# Altium PCB PCB.PcbDoc (part 1 of 2)
Units mil, origin at the board's own origin, x right, y up, seen from the top; angles counter-clockwise.
Board outline 4230 x 2520 mil, 4 copper layers (Top Layer, Int1 (GND), Int2 (PWR), Bottom Layer), stack 62.45 mil thick; 113 components, 91 nets, 361 pads, 344 vias.
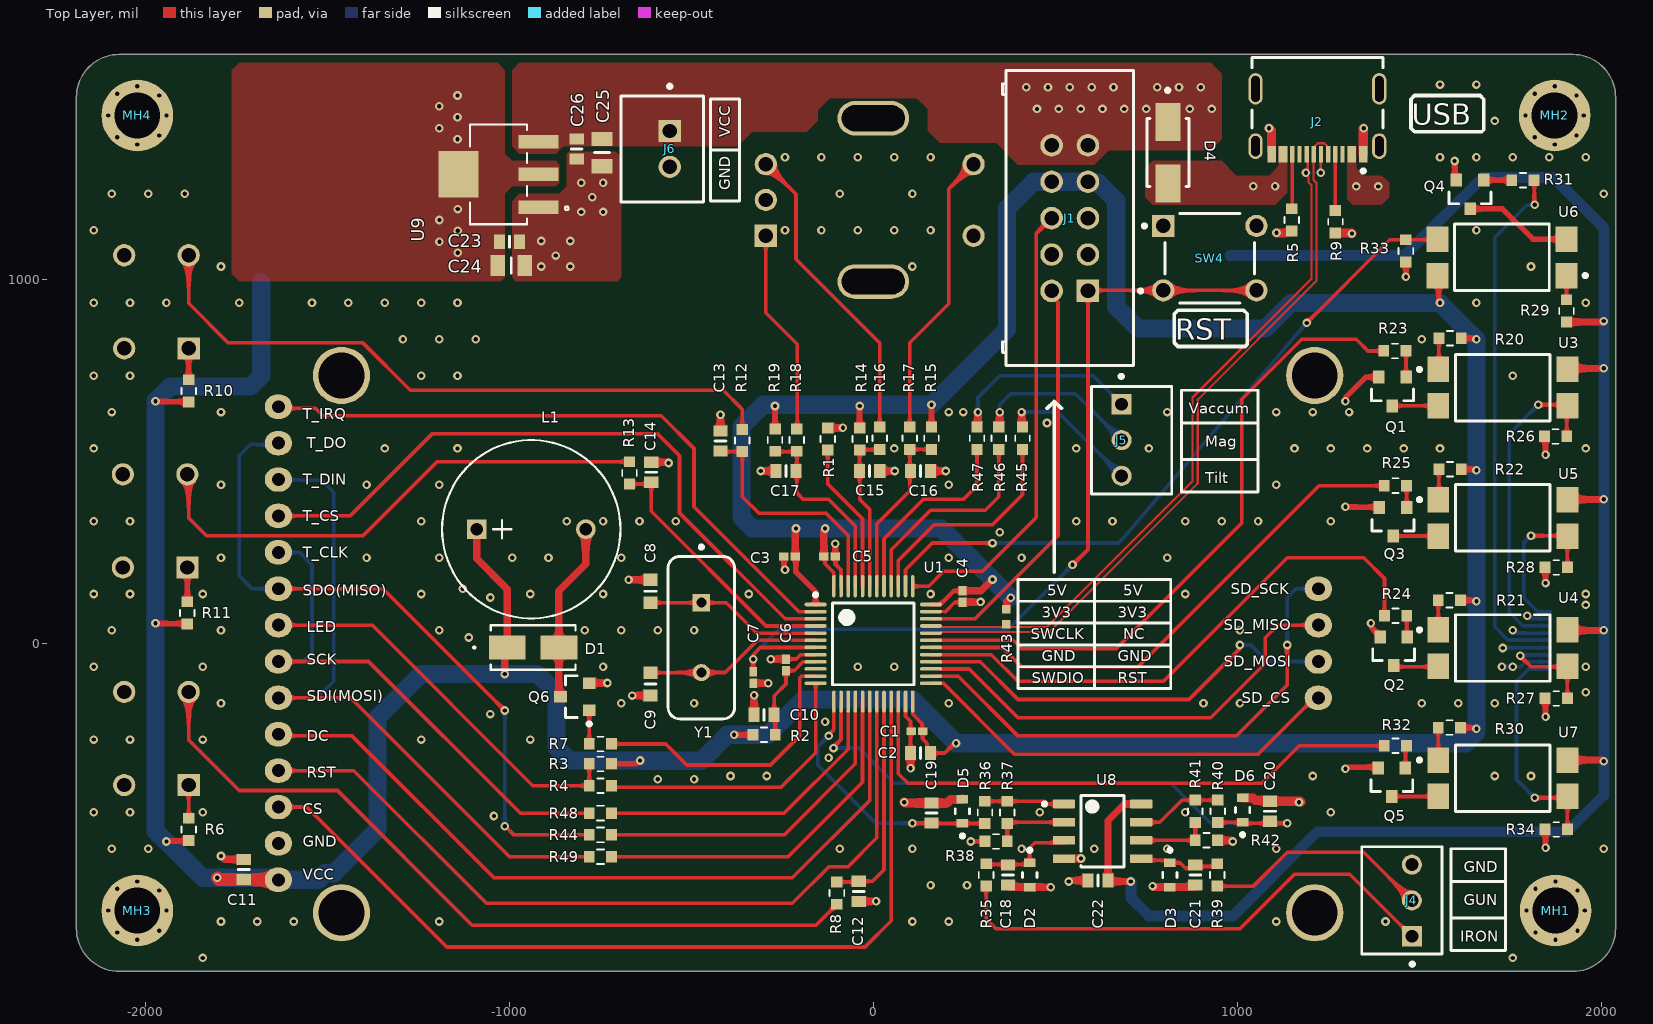
[diagram p0: Top Layer view]
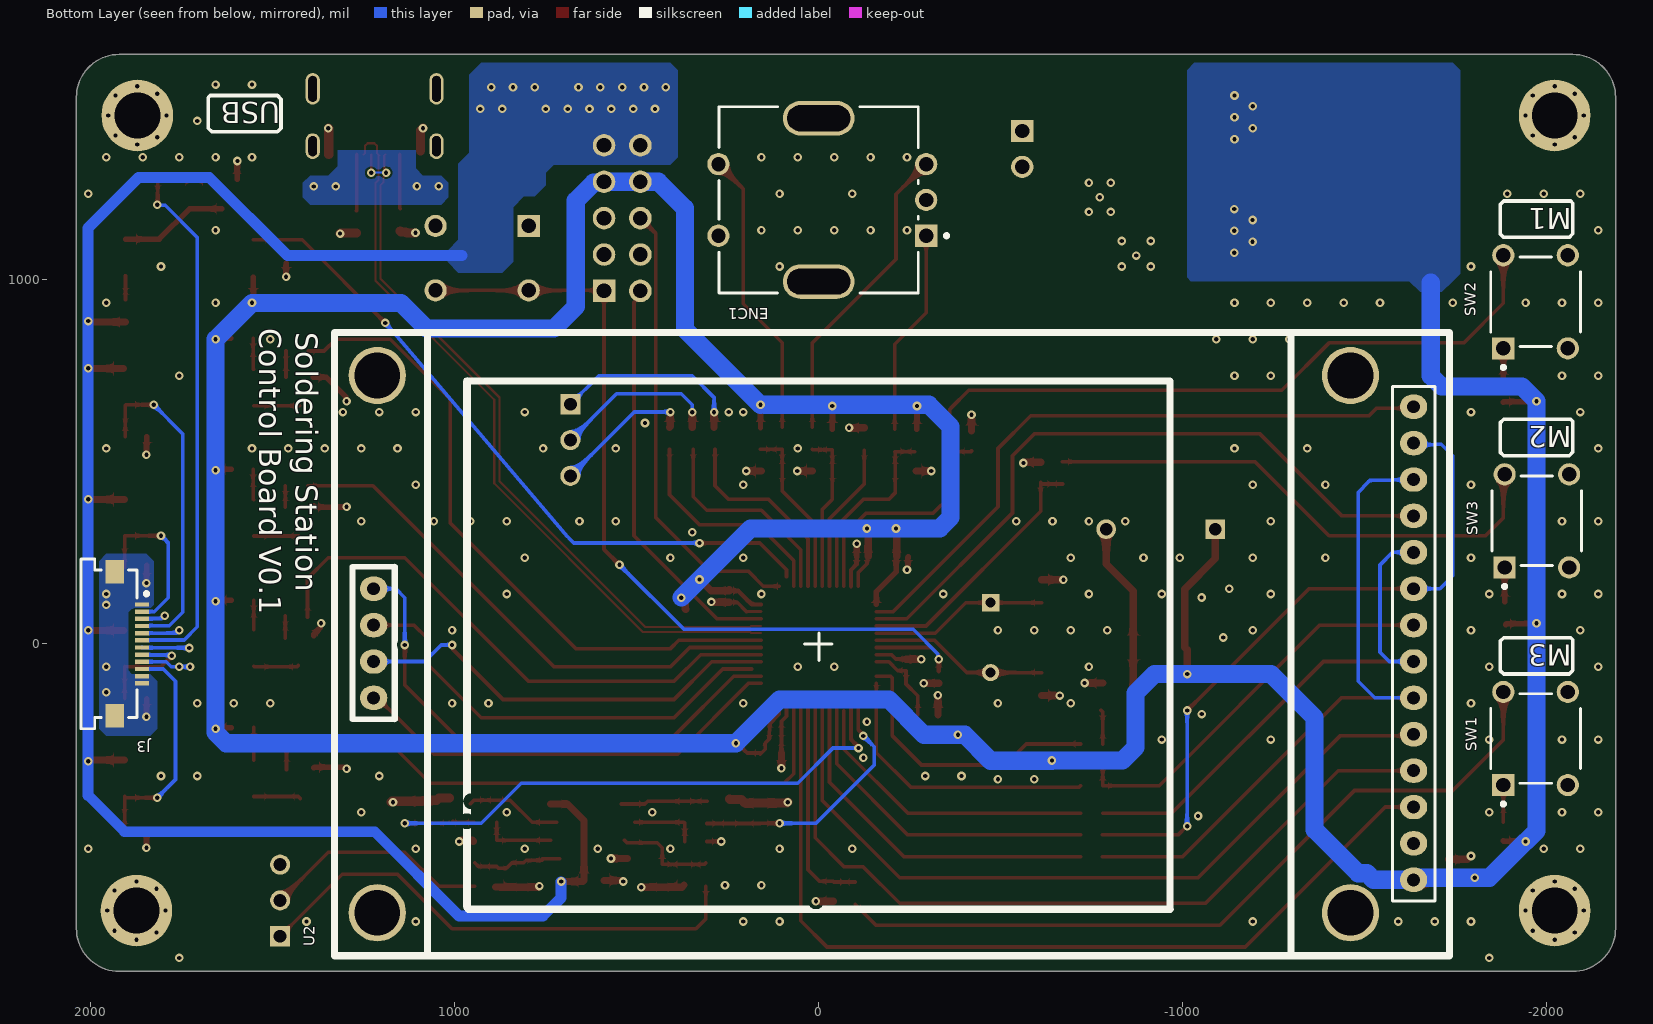
[diagram p1: Bottom Layer view, seen from below]
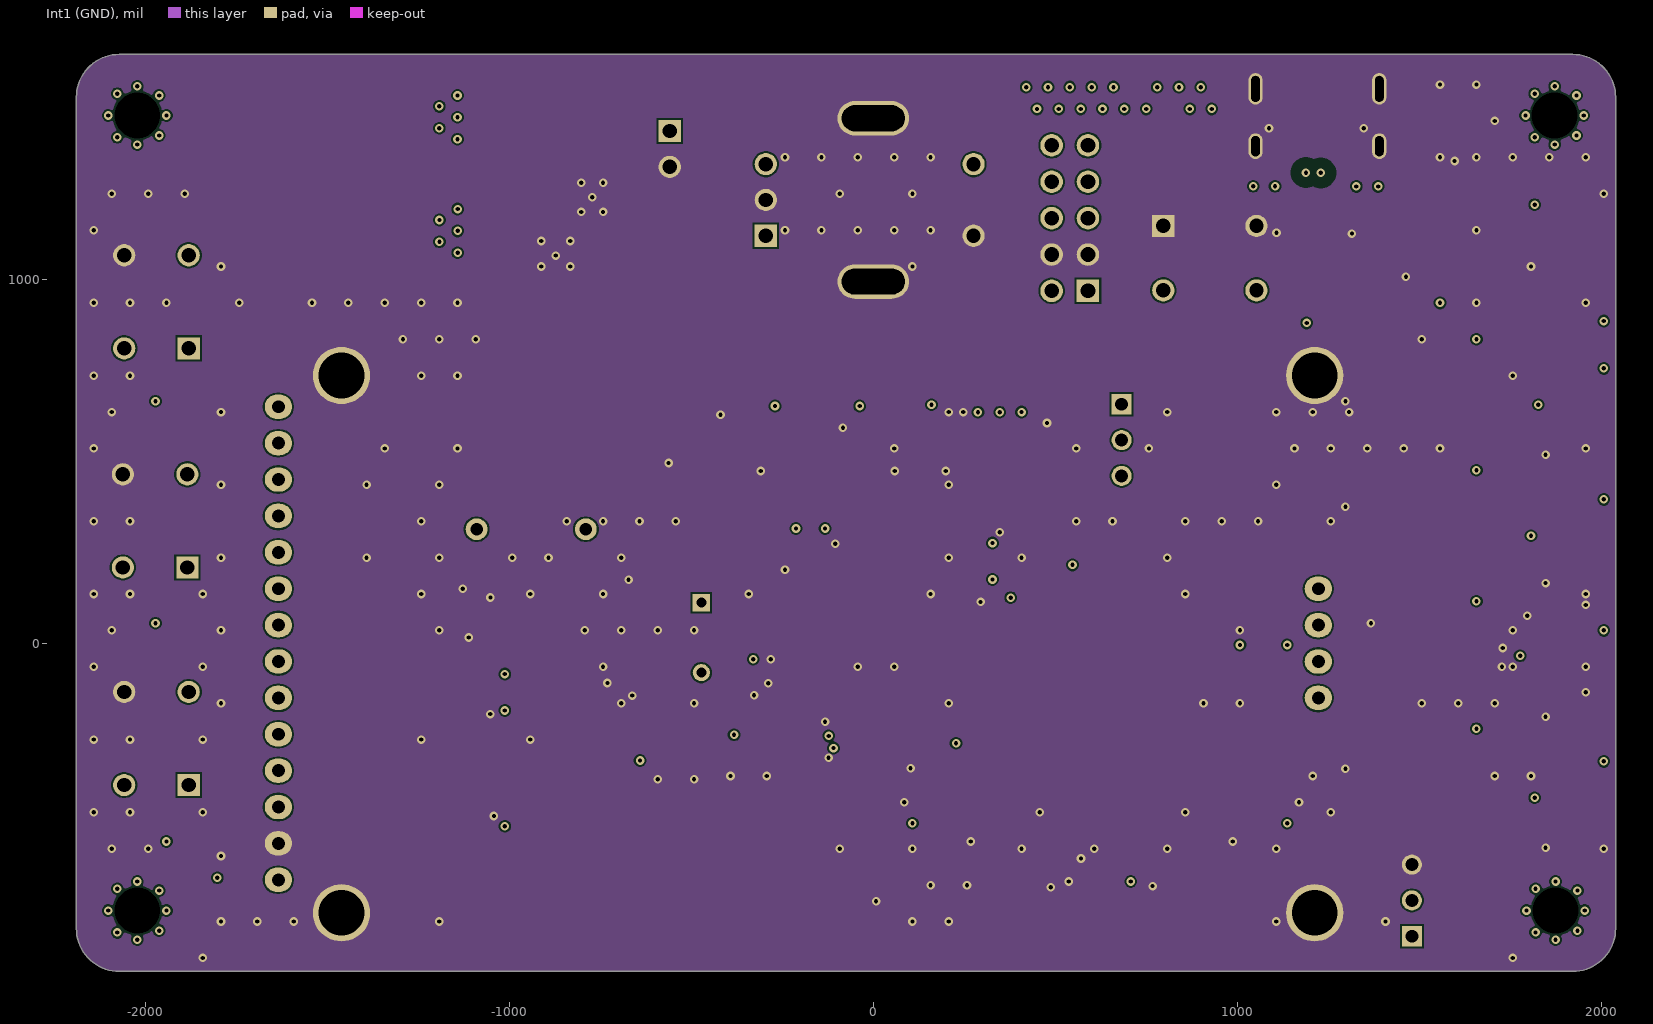
[diagram p2: Int1 (GND)]
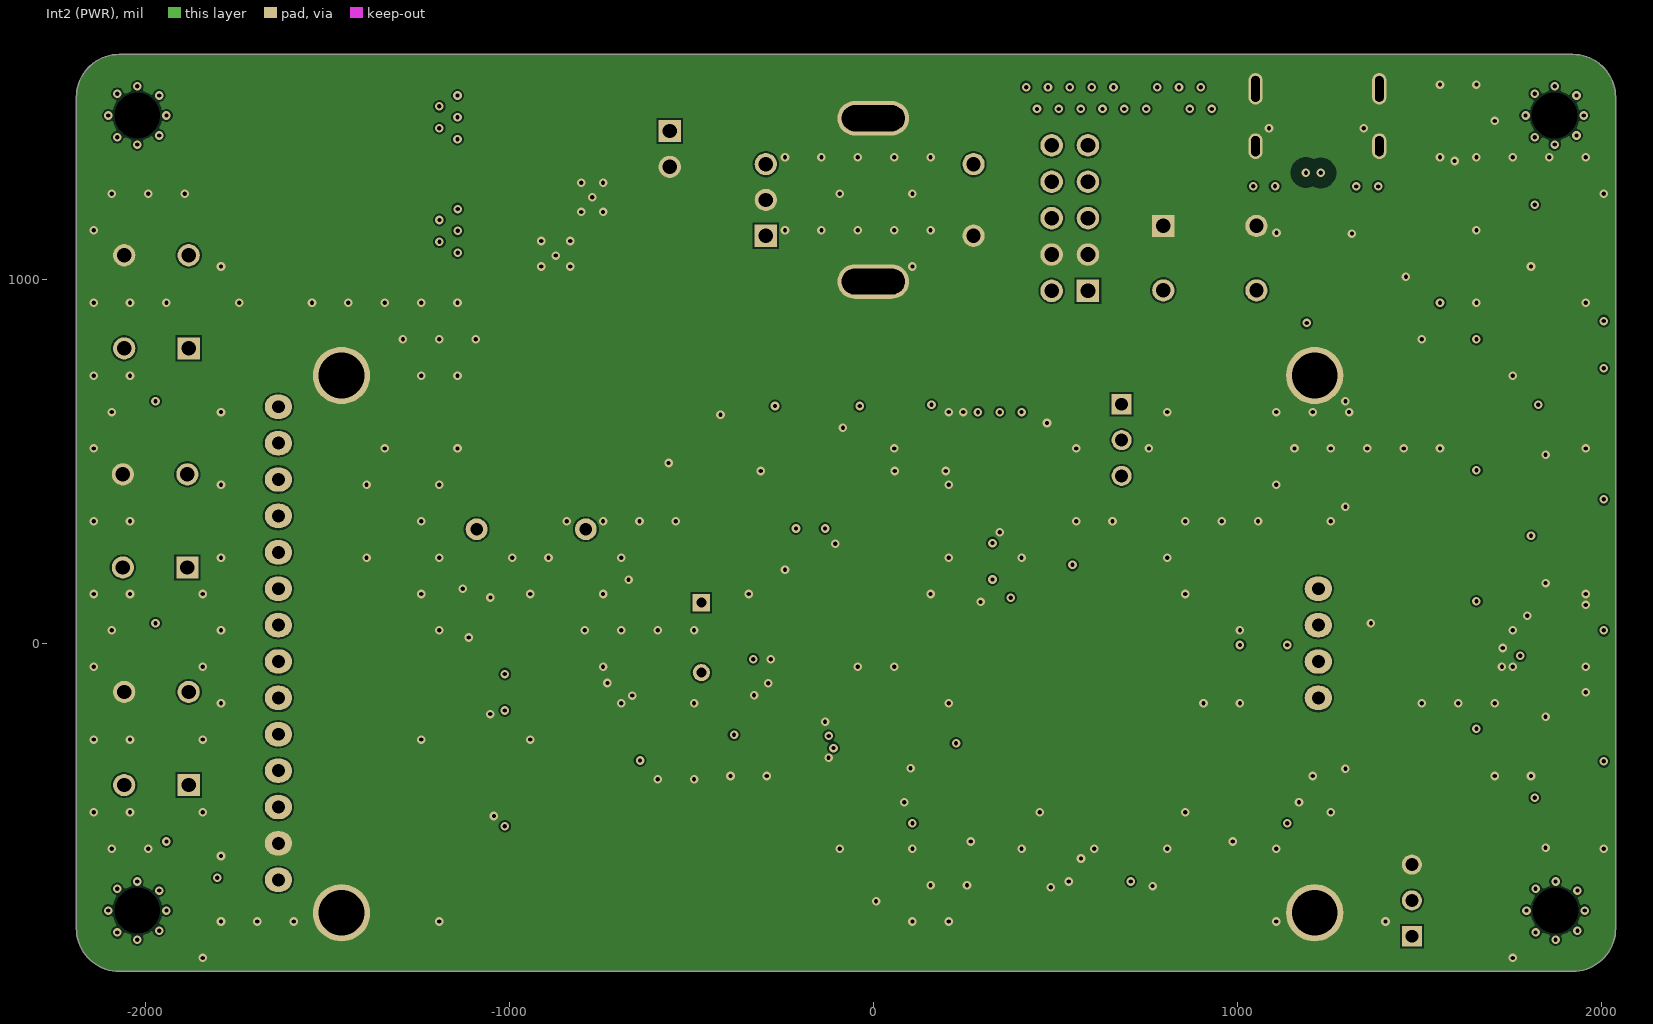
[diagram p3: Int2 (PWR)]
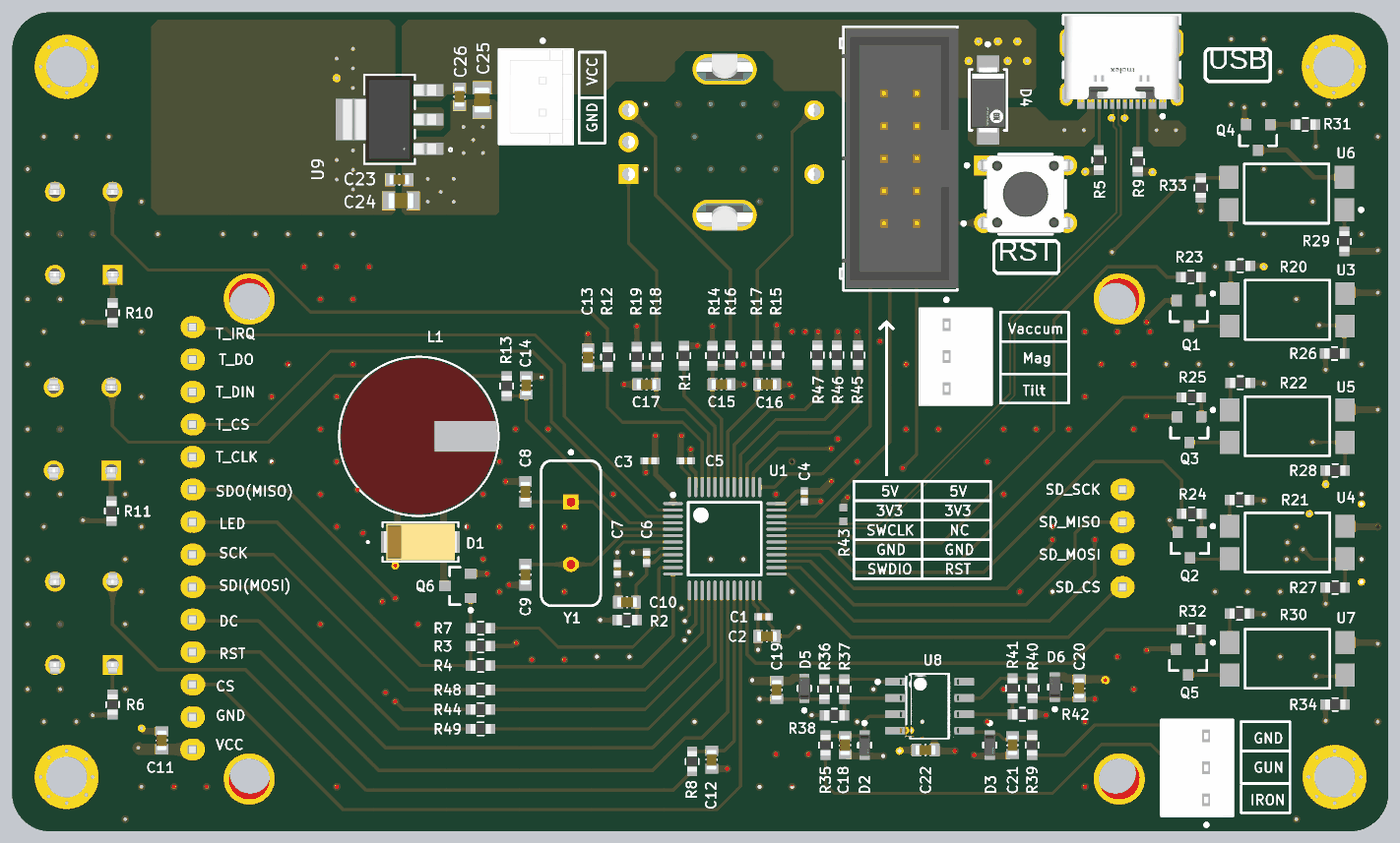
[diagram p5: 3D render of the assembled board from above, using the file's embedded part models]
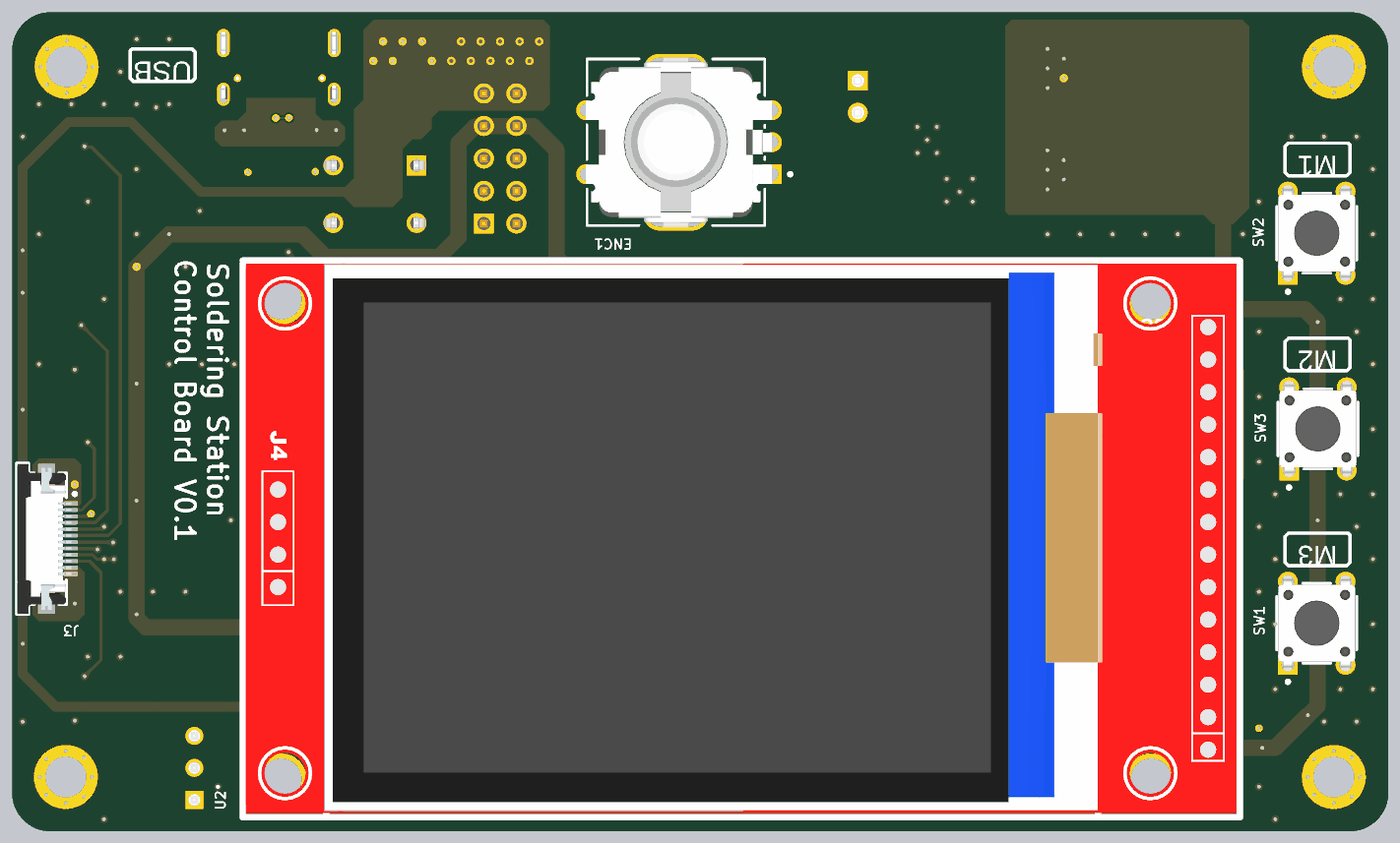
[diagram p6: 3D render of the assembled board from below, using the file's embedded part models]

## Layer stack, top to bottom
Top Solder: solder mask 1, SM-001, Dk 4
Top Layer: signal copper 1.38
Dielectric 1: prepreg 8.28, PP-017, Dk 4.3
Int1 (GND): signal copper 0.6
Dielectric 3: core 41.93, Core-039, Dk 4.8
Int2 (PWR): signal copper 0.6
Dielectric 5: prepreg 8.28, PP-017, Dk 4.3
Bottom Layer: signal copper 1.38
Bottom Solder: solder mask 1, SM-001, Dk 4

## Board outline
-2190,-781.89 -2190,1501.89 cw(c-2071.89,1501.89) -2071.89,1620 1921.89,1620 cw(c1921.89,1501.89) 2040,1501.89 2040,-781.89 cw(c1921.89,-781.89) 1921.89,-900 -2071.89,-900 cw(c-2071.89,-781.89)

## Design rules (kind name [scope] priority, off if disabled: settings)
Clearance diff [InNetClass('USB') vs InNet('GND_ISO')] p1: gap=30 ignorepadtopadclearanceinfootprint=TRUE
Clearance [All] p2: gap=5 ignorepadtopadclearanceinfootprint=FALSE
DiffPairsRouting [All] p1: maxlimit=10 minlimit=5 mostfreqgap=10 toplayer_mingap=8 toplayer_maxgap=8 toplayer_prefgap=8 toplayer_minwidth=6.1 toplayer_maxwidth=6.1 toplayer_prefwidth=6.1 bottomlayer_mingap=8 bottomlayer_maxgap=8 bottomlayer_prefgap=8 bottomlayer_minwidth=6.1 bottomlayer_maxwidth=6.1 bottomlayer_prefwidth=6.1 impedanceprofiledriven=TRUE impedanceprofileid={A0B963EE-60BB-4AA3-AC48-A95A645F43B8} impedanceprofilevalue=100.000000 maxuncoupledlength=500
HoleSize [All] p1: absolutevalues=TRUE maxlimit=3937.01 minlimit=1 maxpercent=80.000 minpercent=20.000
MatchedLengths [InNetClass('USB')] p1: tolerance=20 checknetsindiffpair=FALSE checkdiffpairvsdiffpair=TRUE checkxsignals=TRUE checkothers=TRUE
MinimumSolderMaskSliver [All] p1: minsoldermaskwidth=2
PolygonConnect [All] p1: connectstyle=Direct reliefconductorwidth=10 reliefentries=4 polygonreliefangle="90 Angle" airgapwidth=10
RoutingVias [All] p1: holewidth=39.37 width=23.62 viastyle="Through Hole" minholewidth=11.81 minwidth=23.62 maxholewidth=11.81 maxwidth=3000
SilkToSilkClearance [All] p1: silktosilkclearance=5
SilkToSolderMaskClearance [IsPad] p1: minsilkscreentomaskgap=1 clearancetoexposedcopper=TRUE
SolderMaskExpansion [All] p1: expansion=1 istentingtop=FALSE
SupplyNets "Schematic Supply Nets_4" [InNet('5V0')] p1: voltage=0.000
SupplyNets "Schematic Supply Nets_5" [InNet('GND_ISO')] p2: voltage=0.000
SupplyNets "Schematic Supply Nets_2" [InNet('3V3')] p3: voltage=0.000
SupplyNets "Schematic Supply Nets" [InNet('3V3_VA')] p4: voltage=0.000
UnRoutedNet [All] p1: checkbadconnections=TRUE
Width [All] p1: maxlimit=3000 minlimit=10 preferedwidth=10
24 further rules are at their usual default settings.

## Classes and differential pairs
component class Block_Diagram: C23 C24 C25 C26 J3 J4 J5 J6 MH1 MH2 MH3 MH4 R45 R46 R47 U9
component class Designator: Q1 Q2 Q3 Q4 Q5 R20 R21 R22 R23 R24 R25 R26 R27 R28 R29 R30 R31 R32 R33 R34 U3 U4 U5 U6 U7
net class USB: USB_N USB_P
component class Designator: C11 C12 C13 C14 C15 C16 C17 D1 D4 ENC1 J2 L1 Q6 R3 R4 R5 R6 R7 R8 R9 R10 R11 R12 R13 R14 R15 R16 R17 R18 R19 R44 R48 R49 SW1 SW2 SW3 U2
component class Designator: C18 C19 C20 C21 C22 D2 D3 D5 D6 R35 R36 R37 R38 R39 R40 R41 R42 U8
component class Designator: C1 C2 C3 C4 C5 C6 C7 C8 C9 C10 J1 R1 R2 R43 SW4 U1 Y1
differential pair USB: +USB_P -USB_N

## Components (designator, comment, footprint, x,y, rotation, side; value= is the part's Value field where it differs from the comment)
C1 "CAP-MLCC_SMD-0402_MR-GCM_n_100nF_50V_10%_X7R" "Generic Ceramic 0402 CAP" 120,-240 r0 top value=100nF
C2 "CAP-MLCC_SMD-0603_MR-GRT_u_1uF_50V_10%_X5R" "Generic Ceramic 0603 CAP"#1 125,-295 r0 top value=1µF
C3 "CAP-MLCC_SMD-0402_MR-GCM_n_100nF_50V_10%_X7R" "Generic Ceramic 0402 CAP" -230,240 r0 top value=100nF
C4 "CAP-MLCC_SMD-0402_MR-GCM_n_100nF_50V_10%_X7R" "Generic Ceramic 0402 CAP" 245,130 r90 top value=100nF
C5 "CAP-MLCC_SMD-0402_MR-GCM_n_100nF_50V_10%_X7R" "Generic Ceramic 0402 CAP" -120,240 r180 top value=100nF
C6 "CAP-MLCC_SMD-0402_MR-GCM_n_100nF_50V_10%_X7R" "Generic Ceramic 0402 CAP" -240,-57.79 r270 top value=100nF
C7 "CAP-MLCC_SMD-0402_MR-GCM_n_100nF_50V_10%_X7R" "Generic Ceramic 0402 CAP" -330,-92.46 r90 top value=100nF
C8 "CAP-MLCC_SMD-0603_YGE-CC_p_50pF_50V_5%_C0G" "Generic Ceramic 0603 CAP"#2 -612.53,144.59 r90 top value=50pF
C9 "CAP-MLCC_SMD-0603_YGE-CC_p_50pF_50V_5%_C0G" "Generic Ceramic 0603 CAP"#2 -612.53,-110.53 r270 top value=50pF
C10 "CAP-MLCC_SMD-0603_MR-GRT_u_1uF_50V_10%_X5R" "Generic Ceramic 0603 CAP"#1 -305,-190 r0 top value=1µF
C11 "CAP-MLCC_SMD-0603_MR-GCM_u_0.1uF_50V_10%_X8L" "Generic Ceramic 0603 CAP"#1 -1725,-615.12 r270 top value=100nF
C12 "CAP-MLCC_SMD-0603_MR-GCM_u_0.1uF_50V_10%_X8L" "Generic Ceramic 0603 CAP"#1 -45,-685 r90 top value=100nF
C13 "CAP-MLCC_SMD-0603_MR-GCM_u_0.1uF_50V_10%_X8L" "Generic Ceramic 0603 CAP"#1 -415,562.49 r270 top value=100nF
C14 "CAP-MLCC_SMD-0603_MR-GCM_u_0.1uF_50V_10%_X8L" "Generic Ceramic 0603 CAP"#1 -605,476.55 r270 top value=100nF
C15 "CAP-MLCC_SMD-0603_MR-GCM_u_0.1uF_50V_10%_X8L" "Generic Ceramic 0603 CAP"#1 -5,470 r180 top value=100nF
C16 "CAP-MLCC_SMD-0603_MR-GCM_u_0.1uF_50V_10%_X8L" "Generic Ceramic 0603 CAP"#1 135,470 r180 top value=100nF
C17 "CAP-MLCC_SMD-0603_MR-GCM_u_0.1uF_50V_10%_X8L" "Generic Ceramic 0603 CAP"#1 -245,480 r0 top value=100nF
C18 "CAP-MLCC_SMD-0603_MR-GCM_u_0.1uF_50V_10%_X8L" "Generic Ceramic 0603 CAP"#1 365,-640 r90 top value=100nF
C19 "CAP-MLCC_SMD-0603_MR-GCM_u_0.1uF_50V_10%_X8L" "Generic Ceramic 0603 CAP"#1 165,-460 r270 top value=100nF
C20 "CAP-MLCC_SMD-0603_MR-GCM_u_0.1uF_50V_10%_X8L" "Generic Ceramic 0603 CAP"#1 1095,-455 r270 top value=100nF
C21 "CAP-MLCC_SMD-0603_MR-GCM_u_0.1uF_50V_10%_X8L" "Generic Ceramic 0603 CAP"#1 880,-640 r90 top value=100nF
C22 "CAP-MLCC_SMD-0603_MR-GCM_u_0.1uF_50V_10%_X8L" "Generic Ceramic 0603 CAP"#1 612.56,-645 r0 top value=100nF
C23 "CAP-MLCC_SMD-0603_MR-GCM_u_0.1uF_50V_10%_X8L" "Generic Ceramic 0603 CAP"#1 -995,1100 r180 top value=100nF
C24 "CAP-MLCC_SMD-0805_TDK-CGA_u_10uF_16V_20%_X7S" "Generic Ceramic 0805 CAP" -995,1045 r180 top value=10µF
C25 "CAP-MLCC_SMD-0805_TDK-CGA_u_10uF_16V_20%_X7S" "Generic Ceramic 0805 CAP" -740.81,1349.87 r90 top value=10µF
C26 "CAP-MLCC_SMD-0603_MR-GCM_u_0.1uF_50V_10%_X8L" "Generic Ceramic 0603 CAP"#1 -820,1355 r90 top value=100nF
D1 "DIO-SHOTTKY_SMD_OD-214AC_TWS-1A_100V" DIO-SHOTTKY_SMD_OD-214AC_TWS-1A_100V-Footprint-1 -945,-15 r0 top
D2 "CZRU52C3V3" FP-0603-SOD-523F-MFG 430,-635 r270 top
D3 "CZRU52C3V3" FP-0603-SOD-523F-MFG 815,-635 r270 top
D4 "RS1A" FP-403AE-MFG 810,1350 r270 top value=10pF
D5 "CZRU52C3V3" FP-0603-SOD-523F-MFG 245,-460 r90 top
D6 "CZRU52C3V3" FP-0603-SOD-523F-MFG 1015,-456.54 r90 top
ENC1 "PEC11R-4020F-S0012" FP-PEC11R-4020F-S0012-MFG 0,1220 r90 bottom
J1 "302-S101" FP-302-S101-MFG 540,1170 r90 top
J2 "217179-0001" FP-2171790001-MFG 1220.51,1479.84 r180 top
J3 "687112183622" 687112183622 1950,0 r270 bottom
J4 "B3P-SHF-1AA(LF)(SN)" FP-B3P-SHF-1AA_LF_SN-MFG 1452.44,-705 r90 top
J5 "B3P-SHF-1AA(LF)(SN)" FP-B3P-SHF-1AA_LF_SN-MFG 710,560 r270 top
J6 "B2B-XH-A(LF)(SN)" FP-B2B-XH-A_LF_SN-MFG -580,1360 r270 top
L1 "TMB12A05" TMB12A05-Footprint-1 -940,315 r0 top
MH1 "3mm_Mounting_Hole" Single_3mm_Mounting_Hole 1875,-732.97 r0 top
MH2 "3mm_Mounting_Hole" Single_3mm_Mounting_Hole 1872.47,1452.03 r0 top
MH3 "3mm_Mounting_Hole" Single_3mm_Mounting_Hole -2022.53,-732.97 r0 top
MH4 "3mm_Mounting_Hole" Single_3mm_Mounting_Hole -2022.53,1452.03 r0 top
Q1 "SMMBT2222ALT1G" ONSC-SOT-23-3-318-08_V 1426.65,693.57 r270 top
Q2 "SMMBT2222ALT1G" ONSC-SOT-23-3-318-08_V 1430,-20 r270 top
Q3 "SMMBT2222ALT1G" ONSC-SOT-23-3-318-08_V 1428.39,335.74 r270 top
Q4 "SMMBT2222ALT1G" ONSC-SOT-23-3-318-08_V 1640,1235 r270 top
Q5 "SMMBT2222ALT1G" ONSC-SOT-23-3-318-08_V 1425,-379.94 r270 top
Q6 "SMMBT2222ALT1G" ONSC-SOT-23-3-318-08_V -820,-145 r180 top
R1 "RES-TK_SMD-0603_VIS-CRCW_K_10K_1/10W_1%" Generic_0603_RES -125,562.97 r270 top value=10k
R2 "RES-TK_SMD-0603_VIS-CRCW_K_47K_1/10W_1%" Generic_0603_RES -300,-250 r0 top value=47k
R3 "RES-TK_SMD-0603_VIS-CRCW_R_0R_1/10W_1%" Generic_0603_RES -750,-330 r180 top value=0
R4 "RES-TK_SMD-0603_VIS-CRCW_R_0R_1/10W_1%" Generic_0603_RES -750,-390 r180 top value=0
R5 "RES-TK_SMD-0603_VIS-CRCW_K_5.1K_1/10W_1%" Generic_0603_RES 1150,1165 r270 top value=5.1k
R6 "RES-TK_SMD-0603_VIS-CRCW_K_10K_1/10W_1%" Generic_0603_RES -1881.42,-510 r270 top value=10k
R7 "RES-TK_SMD-0603_VIS-CRCW_K_100K_1/10W_1%" Generic_0603_RES -750,-275 r0 top value=100k
R8 "RES-TK_SMD-0603_VIS-CRCW_K_1.1K_1/10W_1%" Generic_0603_RES -100,-685 r90 top value=1.1k
R9 "RES-TK_SMD-0603_VIS-CRCW_K_5.1K_1/10W_1%" Generic_0603_RES 1270,1160 r270 top value=5.1k
R10 "RES-TK_SMD-0603_VIS-CRCW_K_10K_1/10W_1%" Generic_0603_RES -1881.42,695 r270 top value=10k
R11 "RES-TK_SMD-0603_VIS-CRCW_K_10K_1/10W_1%" Generic_0603_RES -1885,85 r270 top value=10k
R12 "RES-TK_SMD-0603_VIS-CRCW_K_1.1K_1/10W_1%" Generic_0603_RES -360,558.91 r270 top value=1.1k
R13 "RES-TK_SMD-0603_VIS-CRCW_K_1.1K_1/10W_1%" Generic_0603_RES -670,470 r270 top value=1.1k
R14 "RES-TK_SMD-0603_VIS-CRCW_K_10K_1/10W_1%" Generic_0603_RES -37.56,562.97 r90 top value=10k
R15 "RES-TK_SMD-0603_VIS-CRCW_K_10K_1/10W_1%" Generic_0603_RES 160,565 r90 top value=10k
R16 "RES-TK_SMD-0603_VIS-CRCW_K_1.1K_1/10W_1%" Generic_0603_RES 17.56,565 r270 top value=1.1k
R17 "RES-TK_SMD-0603_VIS-CRCW_K_1.1K_1/10W_1%" Generic_0603_RES 100.55,565 r270 top value=1.1k
R18 "RES-TK_SMD-0603_VIS-CRCW_K_1.1K_1/10W_1%" Generic_0603_RES -210,560 r270 top value=1.1k
R19 "RES-TK_SMD-0603_VIS-CRCW_K_10K_1/10W_1%" Generic_0603_RES -270,560 r90 top value=10k
R20 "RES-TK_SMD-0603_VIS-CRCW_K_10K_1/10W_1%" Generic_0603_RES 1585,840 r0 top value=10k
R21 "RES-TK_SMD-0603_VIS-CRCW_K_10K_1/10W_1%" Generic_0603_RES 1583.13,120 r0 top value=10k
R22 "RES-TK_SMD-0603_VIS-CRCW_K_10K_1/10W_1%" Generic_0603_RES 1585,480 r0 top value=10k
R23 "RES-TK_SMD-0603_VIS-CRCW_K_100K_1/10W_1%" Generic_0603_RES 1433.43,805 r180 top value=100k
R24 "RES-TK_SMD-0603_VIS-CRCW_K_100K_1/10W_1%" Generic_0603_RES 1435.28,77.03 r180 top value=100k
R25 "RES-TK_SMD-0603_VIS-CRCW_K_100K_1/10W_1%" Generic_0603_RES 1435,435 r180 top value=100k
R26 "RES-TK_SMD-0603_VIS-CRCW_K_200K_1/10W_1%" Generic_0603_RES 1875,570 r0 top value=200k
R27 "RES-TK_SMD-0603_VIS-CRCW_K_200K_1/10W_1%" Generic_0603_RES 1876.81,-150 r0 top value=200k
R28 "RES-TK_SMD-0603_VIS-CRCW_K_200K_1/10W_1%" Generic_0603_RES 1876.81,210 r0 top value=200k
R29 "RES-TK_SMD-0603_VIS-CRCW_K_10K_1/10W_1%" Generic_0603_RES 1905,915 r270 top value=10k
R30 "RES-TK_SMD-0603_VIS-CRCW_K_10K_1/10W_1%" Generic_0603_RES 1583.13,-230 r0 top value=10k
R31 "RES-TK_SMD-0603_VIS-CRCW_K_100K_1/10W_1%" Generic_0603_RES 1785,1274.37 r0 top value=100k
R32 "RES-TK_SMD-0603_VIS-CRCW_K_100K_1/10W_1%" Generic_0603_RES 1435,-280 r180 top value=100k
R33 "RES-TK_SMD-0603_VIS-CRCW_K_200K_1/10W_1%" Generic_0603_RES 1463.72,1080 r90 top value=200k
R34 "RES-TK_SMD-0603_VIS-CRCW_K_200K_1/10W_1%" Generic_0603_RES 1876.81,-510 r0 top value=200k
R35 "RES-TK_SMD-0603_VIS-CRCW_K_47K_1/10W_1%" Generic_0603_RES 310,-635 r90 top value=47k
R36 "RES-TK_SMD-0603_VIS-CRCW_K_47K_1/10W_1%" Generic_0603_RES 306.85,-462.97 r270 top value=47k
R37 "RES-TK_SMD-0603_VIS-CRCW_K_100K_1/10W_1%" Generic_0603_RES 368.1,-462.97 r90 top value=100k
R38 "RES-TK_SMD-0603_VIS-CRCW_K_1K_1/10W_1%" Generic_0603_RES 337.47,-542.97 r0 top value=1k
R39 "RES-TK_SMD-0603_VIS-CRCW_K_47K_1/10W_1%" Generic_0603_RES 945,-635 r90 top value=47k
R40 "RES-TK_SMD-0603_VIS-CRCW_K_47K_1/10W_1%" Generic_0603_RES 946.24,-460 r270 top value=47k
R41 "RES-TK_SMD-0603_VIS-CRCW_K_100K_1/10W_1%" Generic_0603_RES 885,-460 r90 top value=100k
R42 "RES-TK_SMD-0603_VIS-CRCW_K_1K_1/10W_1%" Generic_0603_RES 915.62,-540 r180 top value=1k
R43 "RES-TK_SMD-0402_VIS-CRCW_K_1.5K_1/10W_1%" Generic_0402__RES 365,74.33 r90 top value=1.5k
R44 "RES-TK_SMD-0603_VIS-CRCW_R_22R_1/10W_1%" Generic_0603_RES -750,-525 r180 top value=22
R45 "RES-TK_SMD-0603_VIS-CRCW_K_10K_1/10W_1%" Generic_0603_RES 410,565 r90 top value=10k
R46 "RES-TK_SMD-0603_VIS-CRCW_K_10K_1/10W_1%" Generic_0603_RES 345,565 r90 top value=10k
R47 "RES-TK_SMD-0603_VIS-CRCW_K_10K_1/10W_1%" Generic_0603_RES 285,565 r90 top value=10k
R48 "RES-TK_SMD-0603_VIS-CRCW_R_22R_1/10W_1%" Generic_0603_RES -750,-465 r180 top value=22
R49 "RES-TK_SMD-0603_VIS-CRCW_R_22R_1/10W_1%" Generic_0603_RES -750,-585 r180 top value=22
SW1 "TL1105AF160Q" FP-TL1105AF160Q-MFG -1970,-260 r90 bottom
SW2 "TL1105AF160Q" FP-TL1105AF160Q-MFG -1970,940 r90 bottom
SW3 "TL1105AF160Q" FP-TL1105AF160Q-MFG -1973.58,337.95 r90 bottom
SW4 "TL1105AF160Q" FP-TL1105AF160Q-MFG 925,1060 r0 top
U1 "STM32F103C8T6" STM-LQFP48_L 0,0 r0 top locked
U2 "TFT 240x320 SPI" "TFT ILI9341 2.4inch" -270,-46.01 r0 bottom locked
U3 "H11A817ASD" FAIR-H11A817ASD-4_V 1729.97,704.2 r90 top
U4 "H11A817ASD" FAIR-H11A817ASD-4_V 1729.97,-11.47 r90 top
U5 "H11A817ASD" FAIR-H11A817ASD-4_V 1729.97,346.37 r90 top
U6 "H11A817ASD" FAIR-H11A817ASD-4_V 1727.47,1062.04 r270 top
U7 "H11A817ASD" FAIR-H11A817ASD-4_V 1729.97,-369.31 r90 top
U8 "LM358DR" FP-D0008A-MFG 630,-515 r0 top
U9 "AMS1117-3.3" AMS1117-3.3-Footprint-1 -1020,1290 r90 top
Y1 "FOXSLF/080-20" FOX-FOXSLF080-20 -472.53,17.03 r270 top

## Footprints (in the part's own frame and the unit in brackets; to place one, negate y for a bottom-side part, rotate by r counter-clockwise, add the part's x,y. Pads: shape width x height; smd on the part's side, far side on the other; paste and mask are expansions set on the pad)
687112183622 [mm] "ZIF Connectors, Horizontal, Top Contact Low Profile, pitch 0.5mm, 12p"
  rect 0.3x1 smd: 1(-2.75,2.3) 2(-2.25,2.3) 3(-1.75,2.3) 4(-1.25,2.3) 5(-0.75,2.3) 6(-0.25,2.3) 7(0.25,2.3) 8(0.75,2.3) 9(1.25,2.3) 10(1.75,2.3) 11(2.25,2.3) 12(2.75,2.3)
  rect 1.65x1.3 smd: M1(-5.025,0.4) M2(5.025,0.4)
  silkscreen extent -5.92,-1.95 5.93,2.72, body extent -5.85,-1.9 5.85,2.35, height 1.28
AMS1117-3.3-Footprint-1 [mil]
  rect 37x110 smd paste+0 mask+0: 1(-90.16,-100.5) 2(0,-100.5) 3(90.16,-100.5)
  rect 128x110 smd paste+0 mask+0: 4(0,120.5)
  silkscreen extent -137,-182 137,88, body extent -132,-134 132,154, height 71
DIO-SHOTTKY_SMD_OD-214AC_TWS-1A_100V-Footprint-1 [mil]
  rect 101x67 smd paste+0 mask+0: 1(-61,5) 2(81,5)
  silkscreen extent -154,-56 126,66, body extent -101,-51 121,61, height 118
FAIR-H11A817ASD-4_V [mm] "SMD, 4-Leads, Body 6.605x4.64mm, Pitch 2.54mm"
  rect 1.78x1.525 smd: 1(1.27,4.507) 2(-1.27,4.507) 3(-1.27,-4.507) 4(1.27,-4.507)
  silkscreen extent -2.32,-3.3 2.32,5.94, body extent -2.32,-3.3 2.32,3.3, height 5.59
FOX-FOXSLF080-20 [mm] "THD, 2-Leads, Body 11.35x4.65mm"
  rect 1.2x1.2 hole 0.7: 1(-2.44,0)
  round 1.2 hole 0.7: 2(2.44,0)
  silkscreen extent -6.45,-2.32 5.68,2.32, body extent -5.67,-2.32 5.68,2.33, height 3.6
FP-302-S101-MFG [mm]
  rect 1.57x1.57 hole 1.02 paste-2539.97 mask+0: 1(-5.08,-1.27)
  round 1.57 hole 1.02 paste-2539.97 mask+0: 2(-5.08,1.27) 3(-2.54,-1.27) 4(-2.54,1.27) 5(0,-1.27) 6(0,1.27) 7(2.54,-1.27) 8(2.54,1.27) 9(5.08,-1.27) 10(5.08,1.27)
  silkscreen extent -10.3,-5.07 10.3,4.7, body extent -10.4,-4.55 10.4,4.8, height 0.25
FP-403AE-MFG [mm]
  rect 2.65x1.75 smd paste+0 mask+0: 1(-2.15,0) 2(2.15,0)
  silkscreen extent -4.47,-1.48 2.37,1.48, body extent -3.57,-1.58 3.57,1.58, height 0.25
FP-0603-SOD-523F-MFG [mm]
  rect 0.6x0.8 smd paste+0 mask+0: 1(-0.85,0) 2(0.85,0)
  silkscreen extent -1.85,-0.5 0.18,0.5, body extent -1.25,-0.6 1.25,0.6, height 0.25
FP-2171790001-MFG [mm]
  rrect100% 1x1.8 hole 1.4 slot 0.6 at 0 deg paste-2539.97 mask+0: 1(-4.32,2.85) 2(4.32,2.85)
  rrect100% 1x2.2 hole 1.8 slot 0.6 at 0 deg paste-2539.97 mask+0: 3(-4.32,-1.15) 4(4.32,-1.15)
  rect 0.6x1.15 smd paste+0 mask+0: A1-B12(-3.2,3.425) A4-B9(-2.4,3.425) B1-A12(3.2,3.425) B4-A9(2.4,3.425)
  rect 0.3x1.15 smd paste+0 mask+0: A5(-1.25,3.425) A6(-0.25,3.425) A7(0.25,3.425) A8(1.25,3.425) B5(1.75,3.425) B6(0.75,3.425) B7(-0.75,3.425) B8(-1.75,3.425)
  silkscreen extent -4.57,-3.35 4.57,4.7, body extent -4.92,-3.45 4.92,4.1, height 0.25
FP-B2B-XH-A_LF_SN-MFG [mm]
  rect 1.55x1.55 hole 1 paste-2539.97 mask+0: 1(-1.25,0.525)
  round 1.55 hole 1 paste-2539.97 mask+0: 2(1.25,0.525)
  silkscreen extent -4.5,-2.88 3.7,2.88, body extent -3.8,-2.98 3.8,2.98, height 0.25
FP-B3P-SHF-1AA_LF_SN-MFG [mm]
  rect 1.4x1.4 hole 0.9 paste-2539.97 mask+0: 1(-2.5,-0.7)
  round 1.4 hole 0.9 paste-2539.97 mask+0: 2(0,-0.7) 3(2.5,-0.7)
  silkscreen extent -4.57,-2.8 3.75,2.8, body extent -3.85,-2.9 3.85,2.9, height 0.25
FP-D0008A-MFG [mm]
  rrect17% 1.55x0.6 smd paste+0 mask+0: 1(-2.7,1.905) 2(-2.7,0.635) 3(-2.7,-0.635) 4(-2.7,-1.905) 5(2.7,-1.905) 6(2.7,-0.635) 7(2.7,0.635) 8(2.7,1.905)
  silkscreen extent -4.17,-2.5 1.5,2.5, body extent -3.57,-2.75 3.57,2.75, height 0.25
FP-PEC11R-4020F-S0012-MFG [mm]
  round 1.55 hole 1 paste-2539.97 mask+0: 1(-2.5,7) 2(2.5,7) B(2.5,-7.5) C(0,-7.5)
  rrect100% 2.4x5 hole 4.4 slot 1.8 at 0 deg paste-2539.97 mask+0: 3(-5.7,0) 4(5.7,0)
  rect 1.55x1.55 hole 1 paste-2539.97 mask+0: A(-2.5,-7.5)
  silkscreen extent -6.5,-9.05 6.5,6.95, body extent -6.92,-7.55 6.92,7.05, height 27.3
FP-TL1105AF160Q-MFG [mm]
  rect 1.55x1.55 hole 1 paste-2539.97 mask+0: 1(-3.25,2.25)
  round 1.55 hole 1 paste-2539.97 mask+0: 2(3.25,2.25) 3(-3.25,-2.25) 4(3.25,-2.25)
  silkscreen extent -4.7,-3.13 3.13,3.13, body extent -3.95,-3 3.95,3, height 5.25
"Generic Ceramic 0402 CAP" [mm]
  rect 0.653x0.55 smd paste+0 mask+0: 1(-0.402,0) 2(0.402,0)
  body extent -0.53,-0.28 0.53,0.28, height 0.55
"Generic Ceramic 0603 CAP"#1 [mm]
  rect 0.78x0.99 smd: 1(-0.573,-0.127) 2(0.827,-0.127)
  silkscreen extent 0.13,-0.51 0.13,0.25, body extent -0.67,-0.53 0.93,0.28, height 0.9
"Generic Ceramic 0603 CAP"#2 [mm]
  rect 0.864x0.965 smd paste+0 mask+0: 1(-0.8,0) 2(0.8,0)
  silkscreen extent 0,-0.38 0,0.38, body extent -0.8,-0.4 0.8,0.41, height 0.9
"Generic Ceramic 0805 CAP" [mm]
  rect 1x1.45 smd: 1(-0.95,0.127) 2(0.95,0.127)
  silkscreen extent 0,-0.4 0,0.65, body extent -1,-0.5 1,0.75, height 0.94
Generic_0402__RES [mm]
  rect 0.6x0.6 smd: 1(-0.525,0) 2(0.525,0)
Generic_0603_RES [mm]
  rect 0.756x0.8 smd paste+0 mask+0: 1(-0.778,0) 2(0.778,0)
  silkscreen extent -0.21,-0.51 0.21,0.51, body extent -0.8,-0.4 0.8,0.4, height 0.71
ONSC-SOT-23-3-318-08_V [mm] "SOT23, 3-Leads, Body 2.92x1.3mm, Pitch 0.95mm"
  rect 0.9x0.8 smd: 1(-1,0.95) 2(-1,-0.95) 3(1,0)
  silkscreen extent -0.17,-1.46 0.65,1.46, body extent -0.65,-1.46 0.65,1.46, height 1.11
Single_3mm_Mounting_Hole [mm]
  round 5 / inner round 1.524 / far side round 5 hole 3.2: 1(0,0)
  body extent -2.74,-2.75 2.75,2.75, height 3.98
STM-LQFP48_L [mm] "QFP, 48-Leads, Body 7x7mm, Pitch 0.5mm, IPC High Density"
  oval 1.55x0.25 smd: 1(-4.025,2.75) 2(-4.025,2.25) 3(-4.025,1.75) 4(-4.025,1.25) 5(-4.025,0.75) 6(-4.025,0.25) 7(-4.025,-0.25) 8(-4.025,-0.75) 9(-4.025,-1.25) 10(-4.025,-1.75) 11(-4.025,-2.25) 12(-4.025,-2.75) 25(4.025,-2.75) 26(4.025,-2.25) 27(4.025,-1.75) 28(4.025,-1.25) 29(4.025,-0.75) 30(4.025,-0.25) 31(4.025,0.25) 32(4.025,0.75) 33(4.025,1.25) 34(4.025,1.75) 35(4.025,2.25) 36(4.025,2.75)
  oval 0.25x1.55 smd: 13(-2.75,-4.025) 14(-2.25,-4.025) 15(-1.75,-4.025) 16(-1.25,-4.025) 17(-0.75,-4.025) 18(-0.25,-4.025) 19(0.25,-4.025) 20(0.75,-4.025) 21(1.25,-4.025) 22(1.75,-4.025) 23(2.25,-4.025) 24(2.75,-4.025) 37(2.75,4.025) 38(2.25,4.025) 39(1.75,4.025) 40(1.25,4.025) 41(0.75,4.025) 42(0.25,4.025) 43(-0.25,4.025) 44(-0.75,4.025) 45(-1.25,4.025) 46(-1.75,4.025) 47(-2.25,4.025) 48(-2.75,4.025)
  silkscreen extent -4.15,-2.85 2.85,3.55, body extent -3.5,-3.5 3.5,3.5, height 1.6
"TFT ILI9341 2.4inch" [mm]
  oval 1.9x1.7 hole 0.9: 1(-34.668,15.3) 2(-34.668,12.76) 3(-34.668,10.22) 4(-34.668,7.68) 5(-34.668,5.14) 6(-34.668,2.6) 7(-34.668,0.06) 8(-34.668,-2.48) 9(-34.668,-5.02) 10(-34.668,-7.56) 11(-34.668,-10.1) 12(-34.668,-12.64) 13(-34.668,-15.18) 14(-34.668,-17.72) 15(37.922,-5.016) 16(37.922,-2.476) 17(37.922,0.064) 18(37.922,2.604)
  round 4 hole 3.2: 2(-30.26,-19.904) 2(-30.26,17.603) 2(37.667,-19.904) 2(37.667,17.603)
  silkscreen extent -37.18,-22.9 40.67,20.6, body extent -36.88,-22.68 40.46,20.28, height 7.34
TMB12A05-Footprint-1 [mil]
  rect 54x54 / inner round 60 / far side rect 54x54 hole 34 paste-99999 mask+0: 1(-150,0)
  round 54 / inner round 60 / far side round 54 hole 34 paste-99999 mask+0: 2(150,0)
  silkscreen extent -245,-245 245,245, body extent -240,-240 241,240, height 383

## Part data
C1 C3 C4 C5 C6 C7: library part CMP-001-00170-1, "Ceramic Capacitor, Ceramic, 50V, 10% +Tol, 10% -Tol, X7R, 15% TC, 0.1uF, Surface Mount, 0402", Capacitor Type=Ceramic, Case/Package=0402, Max Operating Temperature=125°C, Min Operating Temperature=-55°C, Mounting Technology="Surface Mount", Pins=2, RoHS Compliant=Yes
C2 C10: library part CMP-001-00191-2, "Multilayer Ceramic Capacitors MLCC - SMD/SMT 0603 50Vdc 1.0uF X5R 10%", Capacitor Type=Ceramic, Case/Package=0603, Dielectric=X5R, Max Operating Temperature=85°C, Min Operating Temperature=-55°C, Tolerance=10%, Voltage Rating=50V, Automotive=AEQ-200, Mounting Technology="Surface Mount", Pins=2, RoHS Compliant=Yes
C8 C9: library part CMP-001-00198-1, "Surface Mount Ceramic Multilayer Capacitor 50pF 5% C0G 50V 0603 Paper T/R", Capacitor Type=Ceramic, Case/Package=0603, Dielectric=COG, Max Operating Temperature=125°C, Min Operating Temperature=-55°C, Voltage Rating=50V, Automotive=NONE, Mounting Technology="Surface Mount", Pins=2, RoHS Compliant=Yes
C11 C12 C13 C14 C15 C16 C17 C18 C19 C20 C21 C22 C23 C26: library part CMP-001-00115-11, "Ceramic Capacitor, Multilayer, Ceramic, 50V, 10% +Tol, 10% -Tol, X8L, -40/+15% TC, 0.1uF, Surface Mount, 0603", Capacitor Type=Ceramic, Case/Package=0603, Max Operating Temperature=150°C, Min Operating Temperature=-55°C, Voltage Rating=50V, Automotive=AEQ-200, Mounting Technology="Surface Mount", Pins=2, RoHS Compliant=Yes
C24 C25: library part CMP-001-00173-2, "Ceramic Capacitor, Multilayer, Ceramic, 16V, 20% +Tol, 20% -Tol, X7S, 22% TC, 10uF, Surface Mount, 0805", Capacitor Type=Ceramic, Case/Package=0805, Dielectric=X7S, Tolerance=20%, Voltage Rating=16V, Automotive=AEQ-Q200, Mounting Technology=SMD, Pins=2, RoHS Compliant=Yes
D1: library part CMP-001-0168-2, "Rectifier Diode, Schottky, 1 Phase, 1 Element, 1A, 100V V(RRM), Silicon, DO-214AC", Case/Package=SMA, Forward Current=1A, Forward Voltage=800mV, Manufacturer Lifecycle Status=ACTIVE, Manufacturer Part Number=SS110, Max Forward Surge Current (Ifsm)=40A, Max Operating Temperature=150°C, Max Repetitive Reverse Voltage (Vrrm)=100V, Min Operating Temperature=-55°C, Peak Reverse Current=2mA, Rep Pk Reverse Voltage-Max=150V, Element Configuration=Single, Height=2.3mm, Length=4.6mm, Lifecycle Status=Production, Max Output current=1A, Mounting Technology="Surface Mount", Number of Elements=1, Number of Terminals=2, Peak Non-Repetitive Surge Current=40A, Pins=2, REACH SVHC=No, Reach SVHC Compliant=Yes, Reference Standard=AEC-Q101, Reverse Standoff Voltage=100V, RoHS=Compliant, RoHS Compliant=Yes, Width=2.83mm
D2 D3 D5 D6: library part CMP-20229-000003-1, "DIODE ZENER 3.3V 150MW 0603", Case/Package=SMD/SMT, Max Operating Temperature=125°C, Max Power Dissipation=150mW, Max Reverse Leakage Current=25uA, Min Operating Temperature=-55°C, Output Current=500mA, Package Quantity=1, Tolerance=5%, Voltage Rating (DC)=3.3V, Zener Current=5mA, Element Configuration=Single, Impedance=95R, Lead Free="Lead Free", Mount="Surface Mount", Packaging="Tape and Reel", Power Dissipation=150mW, Power Rating=150mW, Voltage Tolerance=5%, Zener Voltage=3.3V
D4: library part CMP-001-0173-1, "Diode Fast Recovery Rectifier 50V 1A 2-Pin DO-214AC T/R", Average Rectified Current=1A, Case/Package=SMA, Forward Voltage=1.3V, Manufacturer Lifecycle Status=ACTIVE, Max Forward Surge Current (Ifsm)=30A, Max Operating Temperature=150°C, Max Power Dissipation=1.19W, Max Repetitive Reverse Voltage (Vrrm)=50V, Min Operating Temperature=-55°C, Peak Reverse Current=5µA, China RoHS=Non-Compliant, Current Rating=1A, Element Configuration=Single, Forward Current=1A, Height=2.2mm, Lead Free="Lead Free", Length=4.75mm, Lifecycle Status=Production, Max Output current=1A, Max Reverse Voltage (DC)=50V, Max Surge Current=30A, Mounting Technology="Surface Mount", Number of Elements=1, Number of Terminals=2, Output Current=1A, Packaging="Cut Tape", Peak Non-Repetitive Surge Current=30A, Pins=2, Polarity=Standard, Power Dissipation=1.19W, Radiation Hardening=No, REACH SVHC=No, Recovery Time=150ns, Reverse Recovery Time=150ns, Reverse Standoff Voltage=50V, Reverse Voltage=50V, RoHS=Compliant, Schedule B="8541100080, 8541100080", Voltage Rating (DC)=50V, Weight=106mg, Width=2.95mm
ENC1: library part CMP-07421-000045-1, "ROTARY ENCODER MECHANICAL 12PPR", Max Operating Temperature=70°C, Min Operating Temperature=-30°C, Package Quantity=150, Built in Switch=Yes, Detent=No, Encoder Type=Mechanical, Height=13.4mm, Length=26.5mm, Mount="Through Hole", Number of Channels=2, Orientation=Vertical, Output Type=Quadrature, Packaging=Bulk, Pulses per Revolution=12, RoHS Compliant=Yes, Series=PEC11R, Termination="PC Pin", Width=12.5mm
J1: library part CMP-001-0100-1, "Conn Shrouded Header (4 Sides) HDR 10 POS 2.54mm Solder ST Thru-Hole", Color=Black, Contact Resistance=20mΩ, Current Rating=3A, Insulation Resistance=1GΩ, Max Operating Temperature=105°C, Min Operating Temperature=-40°C, Connector Type="Male Pin", Contact Gender=Male, Contact Material=Brass, Contact Plating=Gold, Height=9.15mm, Lifecycle Status=Production, Mounting Technology="Through Hole", Number of Contacts=10, Number of Positions=10, Number of Rows=2, Pins=10, Pitch=2.54mm, REACH SVHC=Yes, RoHS=Compliant, Row Spacing=2.54mm, Terminal Pitch=2.54mm, Termination=Solder
J2: library part CMP-04767-000028-2, "CONN RCP USB2.0 TYP C 24P SMD RA", Current Rating=1.25A, Max Operating Temperature=85°C, Min Operating Temperature=-40°C, Voltage Rating=30V, Contact Material="Gold, Nickel", Gender=Receptacle, Height=3.36mm, NexarPartId=117190526, Number of Contacts=16, USB Standard="USB 2.0"
J3: library part CMP-1502-01592-2, Contact Resistance=30mΩ, Current Rating=400mA, Insulation Resistance=100MΩ, Max Operating Temperature=85°C, Min Operating Temperature=-25°C, Operating Supply Voltage=50V, Gender=Receptacle, Lead Pitch=500µm, Length=6.6mm, NexarPartId=81848331, Number of Pins=12, Orientation=Horizontal, Packaging="Tape and Reel", Pitch=500µm, RoHS=Compliant
J4 J5: library part CMP-17439-000681-1, "CONN HEADER VERT 3POS 2.5MM", Color=Natural, Current Rating=3A, Flammability Rating="UL94 V-0", Voltage Rating=250V, Connector Type=Header, Contact Finish - Mating=TIN, Contact Material=Brass, Contact Mating Length=0.236inch, Contact Plating=Tin, Contact Shape=Square, Contact Type="Male Pin", Fastening Type=Friction, Insulation Color=Natural, Insulation Material=Nylon, Lead Free="Lead Free", Mated Stacking Heights=14.9mm, Mount="Through Hole", Number of Contacts=3, Number of Positions=3, Number of Rows=1, Orientation=Straight, Packaging=Bulk, Pitch=0.098inch, Series=NH, Termination=Solder
J6: library part CMP-001-0161-1, "CONNECTOR HEADER, XH SERIES, 2 POSITION, 2.50MM, Press-Fit Solder, Detent Lock, Natural", Color=Natural, Contact Resistance=20mΩ, Current Rating=3A, Housing Color=White, Insulation Resistance=1GΩ, Max Operating Temperature=85°C, Max Voltage Rating (AC)=250V, Min Operating Temperature=-25°C, China RoHS=Compliant, Connector Type="Male Pin", Contact Gender=Male, Contact Material="Copper, Tin", Contact Plating=Tin, Depth=5.75mm, Fastening Type=Detent, Height=7mm, Housing Material=Polyamide, Lead Free="Lead Free", Lead Pitch=2.5mm, Length=7.4mm, Lifecycle Status=Production, Max Current Rating=3A, Max Voltage Rating (DC)=250V, Mounting Technology="Through Hole", Number of Contacts=2, Number of Positions=2, Number of Rows=1, Orientation=Straight, Pins=2, Pitch=2.5mm, REACH SVHC=Yes, RoHS=Compliant, Terminal Pitch=2.5mm, Termination=Solder, Voltage Rating=250V, Voltage Rating (AC)=250V, Weight=28.349523g, Width=6.35mm, Wire/Cable Gauge=22AWG
L1: library part CMP-001-0165-1, "88dB Active (Built-in Driver Circuit) Electromagnetic Type 2.4kHz Plugin, D=12mm Buzzers ROHS"
MH1 MH2 MH3 MH4: library part CMP-001-0046-3, "3.2mm, sPad Mounting Hole", Size=3mm
Q1 Q2 Q3 Q4 Q5 Q6: library part CMP-1048-00591-1, "General Purpose Transistor, NPN Silicon, 3-Pin SOT-23, Pb-Free, Tape and Reel", Manufacturer="On Semiconductor", ComponentLink1Description="Manufacturer URL", ComponentLink1URL=http://www.onsemi.com/, ComponentLink2Description=Datasheet, ComponentLink2URL=http://www.onsemi.cn/pub_link/Collateral/MMBT2222LT1-D.PDF, ComponentLink3Description="Package Specification", ComponentLink3URL=http://www.onsemi.cn/pub_link/Collateral/318-08.PDF, DatasheetVersion="Rev. 10", fT Min (MHz)=300, IC Continuous (A)=0.6, Mounting Technology="Surface Mount", PackageDescription="3-Pin Small Outline Transistor, Body 2.92 x 1.3 mm, Pitch 0.95 mm", PackageReference=SOT-23-3-318-08, PackageVersion="Rev. AP, 11/2009", Packing="Tape and Reel", PartNumber=SMMBT2222ALT1G, Polarity=NPN, RoHS=TRUE
R1 R6 R10 R11 R14 R15 R19 R45 R46 R47: library part CMP-009-00246-1, "Fixed Resistor, Metal Glaze/thick Film, 0.1W, 10000ohm, 75V, 1% +/-Tol, 100ppm/Cel, Surface Mount, 0603", Case/Package=0603, Max Operating Temperature=155°C, Min Operating Temperature=-55°C, Power=100mW, Tolerance=1%, Voltage Rating=75V, Mounting Technology="Surface Mount", Pins=2, RoHS Compliant=Yes
R2 R35 R36 R39 R40: library part CMP-009-00207-2, "Fixed Resistor, Metal Glaze/thick Film, 0.1W, 47000ohm, 75V, 1% +/-Tol, 100ppm/Cel, Surface Mount, 0603", Case/Package=0603, Max Operating Temperature=155°C, Min Operating Temperature=-55°C, Power=100mW, Tolerance=1%, Voltage Rating=75V, Mounting Technology="Surface Mount", Pins=2, RoHS Compliant=Yes
R3 R4: library part CMP-009-00217-3, "Resistor SMD 0 Ohm 0603 PU=5000 ST, CRCW06030000Z0EA, Vishay", Case/Package=0603, Max Operating Temperature=155°C, Min Operating Temperature=-55°C, Power=100mW, Tolerance=1%, Voltage Rating=75V, Mounting Technology="Surface Mount", Pins=2, RoHS Compliant=Yes
R5 R9: library part CMP-009-00305-1, "Fixed Resistor, Metal Glaze/thick Film, 0.1W, 5100ohm, 75V, 1% +/-Tol, 100ppm/Cel, Surface Mount, 0603", Case/Package=0603, Max Operating Temperature=155°C, Min Operating Temperature=-55°C, Power=100mW, Tolerance=1%, Voltage Rating=75V, Mounting Technology="Surface Mount", Pins=2, RoHS Compliant=Yes
R7 R23 R24 R25 R31 R32 R37 R41: library part CMP-009-00230-4, "Fixed Resistor, Metal Glaze/thick Film, 0.1W, 100000ohm, 75V, 1% +/-Tol, 100ppm/Cel, Surface Mount, 0603", Case/Package=0603, Max Operating Temperature=155°C, Min Operating Temperature=-55°C, Power=100mW, Tolerance=1%, Voltage Rating=75V, Mounting Technology="Surface Mount", Pins=2, RoHS Compliant=Yes
R8 R12 R13 R16 R17 R18: library part CMP-009-00235-1, "Fixed Resistor, Metal Glaze/thick Film, 0.1W, 1100ohm, 75V, 1% +/-Tol, 100ppm/Cel, Surface Mount, 0603", Case/Package=0603, Max Operating Temperature=155°C, Min Operating Temperature=-55°C, Power=100mW, Tolerance=1%, Voltage Rating=75V, Mounting Technology="Surface Mount", Pins=2, RoHS Compliant=Yes
R20 R21 R22 R29 R30: library part CMP-009-00231-2, "Fixed Resistor, Metal Glaze/thick Film, 0.1W, 10000ohm, 75V, 1% +/-Tol, 100ppm/Cel, Surface Mount, 0603", Case/Package=0603, Max Operating Temperature=155°C, Min Operating Temperature=-55°C, Power=100mW, Tolerance=1%, Voltage Rating=75V, Mounting Technology="Surface Mount", Pins=2, RoHS Compliant=Yes
R26 R27 R28 R33 R34: library part CMP-009-00209-5, "Fixed Resistor, Metal Glaze/thick Film, 0.1W, 200000ohm, 75V, 1% +/-Tol, 100ppm/Cel, Surface Mount, 0603", Case/Package=0603, Max Operating Temperature=155°C, Min Operating Temperature=-55°C, Power=100mW, Tolerance=1%, Voltage Rating=75V, Mounting Technology="Surface Mount", Pins=2, RoHS Compliant=Yes
R38 R42: library part CMP-009-00300-1, "Fixed Resistor, Metal Glaze/thick Film, 0.1W, 1000ohm, 75V, 1% +/-Tol, 100ppm/Cel, Surface Mount, 0603", Case/Package=0603, Max Operating Temperature=155°C, Min Operating Temperature=-55°C, Power=100mW, Tolerance=1%, Voltage Rating=75V, Mounting Technology="Surface Mount", Pins=2, RoHS Compliant=Yes
R43: library part CMP-009-00006-1, "Surface Mount Thick Film Resistor, AEC-Q200 CRCW Series, 1.5 kohm, 125 mW, - 1%, 50 V", Case Code (Imperial)=0402, Case Code (Metric)=1005, Max Operating Temperature=155°C, Min Operating Temperature=-55°C, Power Rating=125mW, Tolerance=1%, Voltage Rating=50V, Case/Package=0402, Composition="Thick Film", Lead Free="Lead Free", Packaging="Cut Tape", Pins=2, REACH SVHC=Unknown, RoHS=Compliant, Voltage Rating (DC)=50V, Width=1mm
R44 R48 R49: library part CMP-009-00275-2, "Res Thick Film 0603 22 Ohm 1% 1/10W ±100ppm/°C Molded SMD Paper T/R", Case/Package=0603, Max Operating Temperature=155°C, Min Operating Temperature=-55°C, Power=125mW, Tolerance=1%, Voltage Rating=75V, Mounting Technology="Surface Mount", Pins=2, RoHS Compliant=Yes
SW1 SW2 SW3 SW4: library part CMP-17879-000016-1, "SWITCH TACTILE SPST-NO 0.05A 12V", Color=Black, Contact Current Rating=50mA, Contact Resistance=100mR, Max Operating Temperature=70°C, Max Voltage Rating (DC)=50V, Min Operating Temperature=-20°C, Operating Force=160gf, Package Quantity=750, Voltage Rating (DC)=12V, Actuator Length=1.4mm, Actuator Material=Nylon, Actuator Type=Standard, Contact Material=Bronze, Contact Plating=Silver, Current Rating=50mA, Electrical Life=100000Cycles, Housing Material=Nylon, Illumination Type=Non-Illuminated, Lead Free="Lead Free", Length=6mm, Mechanical Life=100000Cycles, Mount="Through Hole", Orientation=Straight, Packaging=Bulk, Reach SVHC Compliant=Yes, RoHS Compliant=Yes, Series=TL1105, Size=6mm, Switch Function=Off-Mom, Switch Travel=0.25mm, Termination="PC Pin", Throw Configuration=SPST, Width=6mm
U1: library part CMP-0237-00215-3, "ARM Cortex-M3 32-bit MCU, 64 KB Flash, 20 KB Internal RAM, 37 I/Os, 48-pin LQFP, -40 to 85 degC, Tray", I/Os (High Current)=37, Operating Frequency(F) (Processor speed) (MHz)=72, Supply Voltage(Vcc) min (V)=2, A/D Converter="2x12-bit (10 Channel)", ComponentLink1Description="Manufacturer URL", ComponentLink1URL=http://www.st.com/web/en/home.html, ComponentLink2Description=Datasheet, ComponentLink2URL=http://www.st.com/st-web-ui/static/active/en/resource/technical/document/datasheet/CD00161566.pdf, ComponentLink3Description="Package Specification", ComponentLink3URL=http://www.st.com/st-web-ui/static/active/en/resource/technical/document/datasheet/DM00058181.pdf, Core="ARM Cortex-M3", DatasheetVersion="Rev. 16", FLASH Size (Prog) (kB)=64, Internal RAM Size (kB)=20, Mounting Technology="Surface Mount", PackageDescription="48-Pin Low Profile Quad Flat Package, 7 x 7 mm Body, 0.5 mm Pitch", PackageReference=LQFP48, PackageVersion="Rev. 6, 06/2013", Packing=Tray, PartNumber=STM32F103C8T6
U2: library part CMP-001-0162-3
U3 U4 U5 U6 U7: library part CMP-001-0167-1, "OptoCouplers & OptoIsolators Optocoupler SM-DIP4 Phototransistor", Case/Package=SMD/SMT, Collector Emitter Breakdown Voltage=70V, Collector Emitter Saturation Voltage=200mV, Continuous Collector Current=50mA, Current Transfer Ratio=80%, Dark Current=100nA, Forward Voltage=1.5V, Isolation Voltage=5kV, Max Operating Temperature=100°C, Max Power Dissipation=200mW, Min Operating Temperature=-55°C, Reverse Breakdown Voltage=6V, Collector Emitter Voltage (VCEO)=70V, Fall Time=18µs, Forward Current=50mA, Lead Free="Lead Free", Lifecycle Status=Obsolete, Max Collector Current=50mA, Number of Channels=1, Number of Circuits=1, Number of Elements=1, Output Current per Channel=50mA, Output Voltage=70V, Packaging="Tape and Reel", Pins=4, Power Dissipation=200mW, Rise Time=18µs, RoHS=Compliant
U8: library part CMP-1685-00009-2, "IC OPAMP GP 2 CIRCUIT 8SOIC", Case/Package=SOIC, Dual Supply Voltage=9V, Input Bias Current=250nA, Input Offset Voltage (Vos)=7mV, Max Dual Supply Voltage=16V, Max Operating Temperature=70°C, Max Supply Voltage=32V, Min Dual Supply Voltage=1.5V, Min Operating Temperature=0°C, Min Supply Voltage=3V, Nominal Supply Current=1.2mA, Operating Supply Current=1mA, Output Current=30mA, Package Quantity=2500, Power Supply Rejection Ratio (PSRR)=65dB, Voltage Gain=100dB, Bandwidth=700kHz, Common Mode Rejection Ratio=65dB, Contact Plating=Gold, Gain Bandwidth Product=700kHz, Height=1.58mm, Lead Free="Lead Free", Length=4.9mm, Mount="Surface Mount", Number of Amplifiers=2, Number of Channels=2, Number of Circuits=2, Number of Elements=2, Number of Pins=8, Operating Supply Voltage=16V, Output Current per Channel=30mA, Packaging="Tape and Reel", Radiation Hardening=No, REACH SVHC="No SVHC", Slew Rate=0.3V/µs, Unity Gain Bandwidth Product=700kHz, Width=3.91mm
U9: library part CMP-001-0171-3, "Gull Wing EAR99 Fixed Positive Single Output Ldo Regulator Dual Voltage Regulator Linear 125C 1.2W 1A 1.8MM", Case/Package=SOT-223, Dropout Voltage=1.1V, Max Junction Temperature (Tj)=125°C, Max Power Dissipation=1.2W, Max Supply Voltage=15V, Min Operating Temperature=-40°C, Nominal Supply Current=5mA, Output Current=1A, Output Voltage=3.3V, Height=1.8mm, Max Operating Temperature=125°C, Number Of Outputs=1, Pins=2, RoHS=Compliant
Y1: library part CMP-1749-00002-1, "Resistance Weld Thru-Hole Crystal, 8 MHz, -20 to 70 degC, 2-Pin THD, RoHS, Bulk", Case\Package=TO-263-3, Dropout Voltage="2 V", Max Input Voltage="35 V", Max Operating Temperature="125 degC", Max Ouput Current="1 A", Min Input Voltage="7 V", Min Operating Temperature="0 degC", Nominal Output Voltage="5 V", Package Quantity=50, ComponentLink1Description="Manufacturer URL", ComponentLink1URL=http://www.foxonline.com/, ComponentLink2Description=Datasheet, ComponentLink2URL=http://download.siliconexpert.com/pdfs/2015/4/5/6/5/7/200/fox_/manual/35607121449963728hc49slf.pdf, DatasheetVersion=Mar-15, Height="30.02 mm", Length="10.24 mm", Mount="Surface Mount", Output Current="1 A", Output Voltage="5 V", Outputs=1, PackageDescription="2-Pin Through Hole Device, Body 11.35 x 4.65 mm", PackageReference=FOXSLF080-20, Packaging=Rail/Tube, Pins=3, Radiation Hardening=No, REACH SVHC="No SVHC", RoHSCompliant=true, Width="9.35 mm"

## Via types
v1: diameter 23.62/23.62/23.62/23.62 (per signal layer), hole 11.81, Top Layer to Bottom Layer, tented both sides, 171 vias
v2: diameter 23.62, hole 11.81, Top Layer to Bottom Layer, tented both sides, 108 vias
v3: diameter 23.62, hole 11.81, Top Layer to Bottom Layer, 65 vias

## Nets (pads, with @x,y where several pads share a name; then routed paths per layer and width w, separated by ;. In a path a pad name is that pad's centre, name@x,y a point inside that pad or via, vN(x,y) a via of type N, cw(c..) or ccw(c..) an arc to the next point about the centre after c; other vN are vias at no path point)
0_CROSS: R33.2 U1.38 U6.3 | length 1888.2
  Top Layer w10: U1.38@88.66,183.98 88.66,203.66 162.03,277.03 v2(327.47,277.03) ; v2(1190.82,882.03) 1419.41,1110.62 U6.3@1553.59,1110.62
  Bottom Layer w10: v2(327.47,277.03) 672.71,277.03 678.55,282.87 684.12,288.44 689.98,294.3 v2(1190.82,882.03)
0_CROSS_ISO: J3.6 R31.2 | length 1452.8
  Top Layer w10: R31.2@1815.62,1274.37 1816.55,1273.44 1816.55,1207.96 v2(1817.47,1207.03)
  Bottom Layer w10: v2(1817.47,1207.03) 1815.72,1205.28 1795.72,1205.28 1707.47,1117.03 1707.47,47.03 1743.76,10.75 1858.54,10.75 J3.6@1859.45,9.84